# EAGLE board FLR - layout (EAGLE 9.6.2)
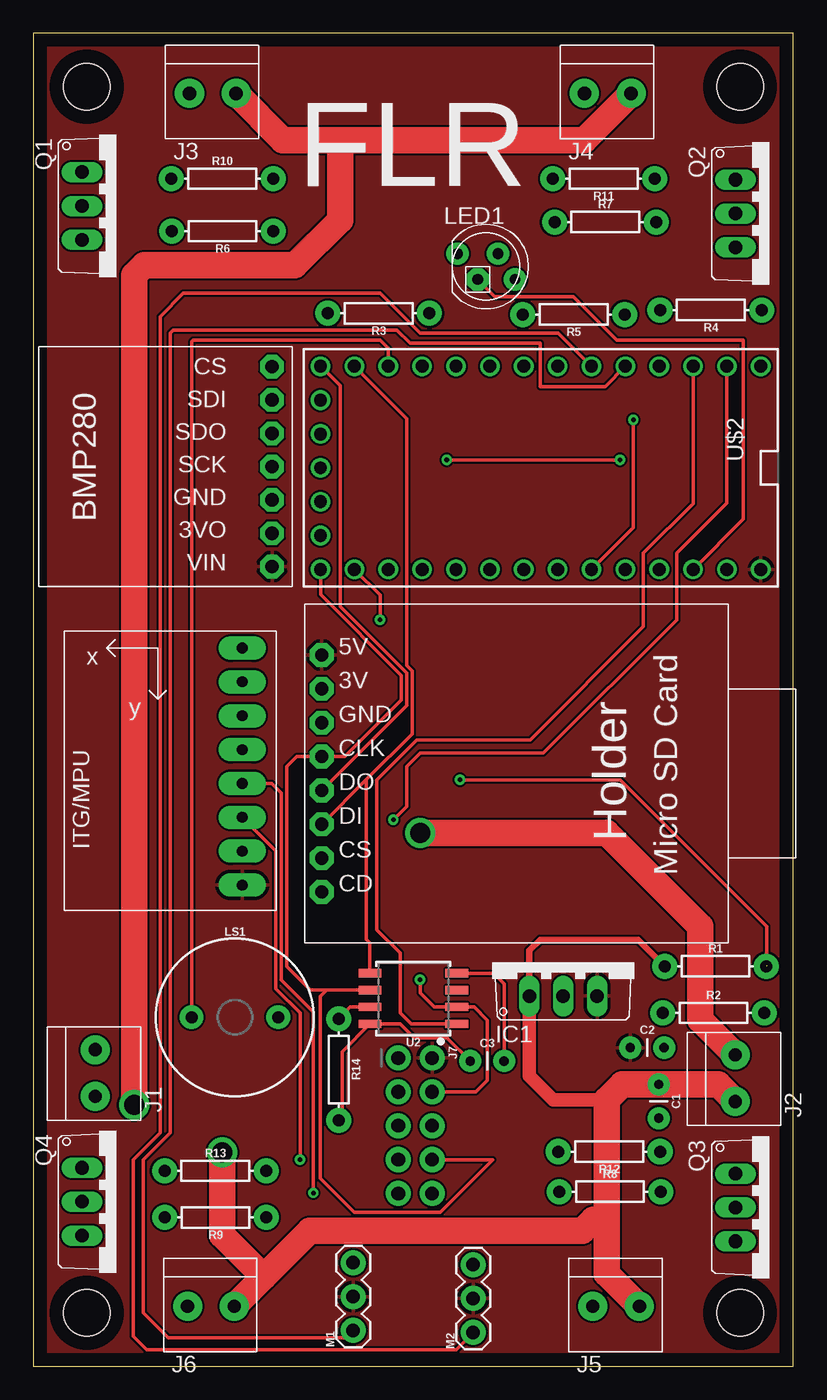
[diagram p0: board, top side]
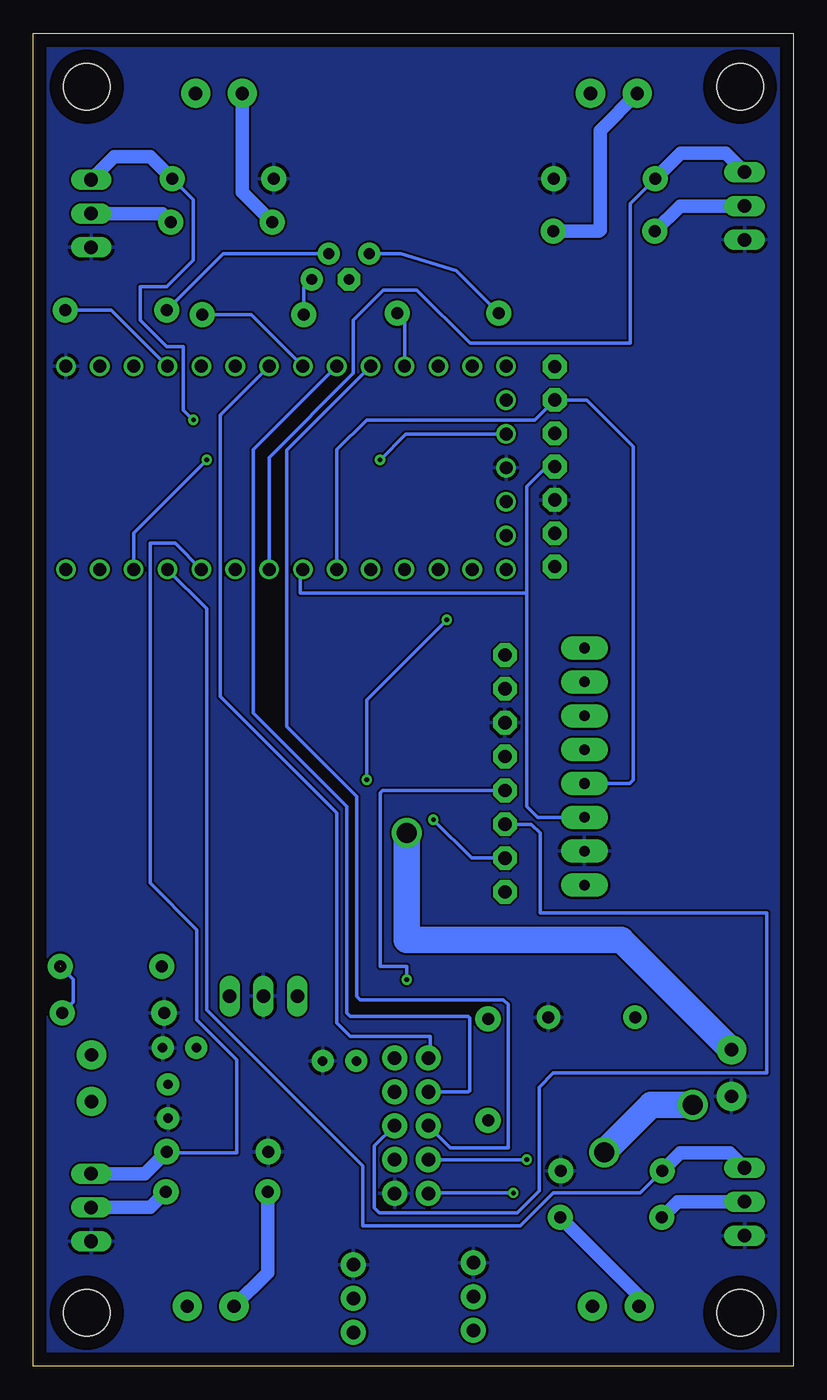
[diagram p1: board, bottom side, seen from below]

Size 57 x 100 mm. Coordinates in mm from the lower left corner, seen from the top.
Outline: 0,0 57,0 57,100 0,100 0,0
Copper layers (1*16): Top 0.035mm / dielectric 1.5mm / Bottom 0.035mm
Design rules "default": minimum track width 6mil, minimum drill 0.35mm, track to track 6mil, track to pad 6mil, pad to pad 6mil, via to via 6mil, smd to smd 6mil, copper to edge 40mil, drill to drill 6mil, minimum pad ring 10mil, minimum via ring 8mil, stop-mask expansion 4mil, vias tented up to drill 0mil, thermal gap 10mil
Holes 3.5 mm at 4,4 53,4 53,96 4,96

## Footprints (pad centres in the part's own frame; a part is rotated, then mirrored left to right if it is on the bottom)
CAP-PTH-2.54 = drill 0.7 pad 1.651: 1 -1.27,0; 2 1.27,0
TO220V = drill 1.016 long: 1 -2.54,-2.54; 2 0,-2.54; 3 2.54,-2.54
1X2-3.5MM = drill 1 pad 2.184: 1 1.8,0; 2 -1.7,0
2X5_NOSILK = drill 1.016 pad 1.88: 1 0,0; 2 0,2.54; 3 2.54,0; 4 2.54,2.54; 5 5.08,0; 6 5.08,2.54; 7 7.62,0; 8 7.62,2.54; 9 10.16,0; 10 10.16,2.54
LED5MMRGB = drill 0.8 pad 1.676: 1 -2.159,0.968; 3 0.889,0.968; 4 2.159,-0.968 | drill 0.8 pad 1.676 octagon: 2 -0.635,-0.968
BUZZER-12MM = drill 0.9 pad 1.778: + 3.25,0; - -3.25,0
1X03 = drill 1.016 pad 1.88: 1 0,0; 2 2.54,0; 3 5.08,0
AXIAL-0.3 = drill 0.9 pad 1.88: P$1 -3.81,0; P$2 3.81,0
GY-521 = drill 0.8 pad 1.778 long: ADO -8.89,-6.35; GND -8.89,6.35; INT -8.89,-8.89; SCL -8.89,3.81; SDA -8.89,1.27; VCC -8.89,8.89; XCL -8.89,-3.81; XDA -8.89,-1.27
SOIC-8 = smd 0.61 x 1.702: 1 -1.905,-3.251; 2 -0.635,-3.251; 3 0.635,-3.251; 4 1.905,-3.251; 5 1.905,3.251; 6 0.635,3.251; 7 -0.635,3.251; 8 -1.905,3.251
MICROSDCARD = drill 1 pad 1.778 octagon: 3V 1.27,19.05; 5V 1.27,21.59; CD 1.27,3.81; CLK 1.27,13.97; CS 1.27,6.35; DI 1.27,8.89; DO 1.27,11.43; GND 1.27,16.51
TEENSY_3.1_BASIC = drill 0.965: 0 -7.62,13.97; 1 -7.62,11.43; 2 -7.62,8.89; 3 -7.62,6.35; 3.3V 7.62,11.43; 3.3V1 -2.54,-16.51; 4 -7.62,3.81; 5 -7.62,1.27; 6 -7.62,-1.27; 7 -7.62,-3.81; 8 -7.62,-6.35; 9 -7.62,-8.89; 10 -7.62,-11.43; 11 -7.62,-13.97; 12 -7.62,-16.51; 13 7.62,-16.51; 14/A0 7.62,-13.97; 15/A1 7.62,-11.43; 16/A2 7.62,-8.89; 17/A3 7.62,-6.35; 18/A4 7.62,-3.81; 19/A5 7.62,-1.27; 20/A6 7.62,1.27; 21/A7 7.62,3.81; 22/A8 7.62,6.35; 23/A9 7.62,8.89; A14 5.08,-16.51; AGND 7.62,13.97; GND -7.62,16.51; GND1 0,-16.51; PGM 2.54,-16.51; VBAT -5.08,-16.51; VIN 7.62,16.51
BMP280 = drill 1 pad 1.778 octagon: 3VO 4,1.5; CS 16.5,1.5; GND 6.5,1.5; SCK 9,1.5; SDI 14,1.5; SDO 11.5,1.5; VIN 1.5,1.5

## Placement (x,y rotation side)
C1  10uf  [CAP-PTH-2.54]  46.9,19.88 270 top
C2  1uf  [CAP-PTH-2.54]  46.04,23.9 0 top
C3  10uf  [CAP-PTH-2.54]  34.03,22.9 0 top
IC1  788TV  [TO220V]  39.74,30.31 0 top
J1  1X2-3.5MM  [1X2-3.5MM]  4.64,22.04 270 top
J2  1X2-3.5MM  [1X2-3.5MM]  52.64,21.66 270 top
J3  1X2-3.5MM  [1X2-3.5MM]  13.51,95.5 180 top
J4  1X2-3.5MM  [1X2-3.5MM]  43.13,95.5 180 top
J5  1X2-3.5MM  [1X2-3.5MM]  43.75,4.5 180 top
J6  1X2-3.5MM  [1X2-3.5MM]  13.37,4.5 180 top
J7  [2X5_NOSILK]  27.37,23.12 270 top
LED1  RGBLED_CA-5MM  [LED5MMRGB]  33.96,82.5 0 top
LS1  BUZZER-PTH  [BUZZER-12MM]  15.12,26.18 0 top
M1  SERVO  [1X03]  23.99,2.68 90 top
M2  SERVO  [1X03]  32.99,2.54 90 top
Q1  [TO220V]  6.2,87.05 270 top
Q2  [TO220V]  55.2,86.48 270 top
Q3  [TO220V]  55.2,11.91 270 top
Q4  [TO220V]  6.2,12.34 270 top
R1  1M  [AXIAL-0.3]  51.17,30.01 0 top
R2  100k  [AXIAL-0.3]  51.01,26.51 0 top
R3  40ohm  [AXIAL-0.3]  25.9,78.99 180 top
R4  1ohm  [AXIAL-0.3]  50.81,79.24 180 top
R5  1ohm  [AXIAL-0.3]  40.53,78.91 180 top
R6  1ohm  [AXIAL-0.3]  14.19,85.16 180 top
R7  1ohm  [AXIAL-0.3]  42.9,85.84 0 top
R8  1ohm  [AXIAL-0.3]  43.24,13.09 0 top
R9  1ohm  [AXIAL-0.3]  13.67,11.16 180 top
R10  470ohm  [AXIAL-0.3]  14.17,89.09 0 top
R11  470ohm  [AXIAL-0.3]  42.78,89.1 180 top
R12  470ohm  [AXIAL-0.3]  43.19,16.1 180 top
R13  470ohm  [AXIAL-0.3]  13.65,14.65 0 top
R14  10M  [AXIAL-0.3]  22.9,22.26 270 top
U1  GY-521MPU6050  [GY-521]  6.78,44.99 180 top
U2  W25Q32FV  [SOIC-8]  28.5,27.58 90 top
U$1  MICROSDCARD  [MICROSDCARD]  20.36,31.77 0 top
U$2  TEENSY_3.1_BASIC  [TEENSY_3.1_BASIC]  38.05,67.4 270 top
U$3  BMP280  [BMP280]  19.4,58.49 90 top

## Library data of the parts
C1-C3 = SparkFun-Capacitors; PROD_ID: CAP-09128
IC1 = linear
J1-J6 LED1 Q1-Q4 = adafruit
J7 = SparkFun-Connectors
LS1 = SparkFun-Electromechanical; PROD_ID: COMP-08253; SF_SKU: COM-07950
M1 M2 = SparkFun-Electromechanical
R1-R14 = SparkFun-Resistors; PROD_ID: RES-09327
U1 = gy-521
U2 = SparkFun-IC-Memory; PROD_ID: IC-13229
U$1 = MicroSD Card Holder
U$2 = Teensy_3_Series_Board_v1.0
U$3 = BMP280

## Nets
3.3V: LED1.2 U$2.3.3V U$2.3.3V1
5V: C2.1 IC1.3 J7.2 M1.2 M2.2 U1.VCC U$1.5V U$2.VIN U$3.VIN
12V: C1.1 IC1.1 J2.1 J3.2 J4.2 J5.2 J6.2 R1.P$1
AGND: U$2.AGND
BATT+: J1.2 J2.2
BUZZER: LS1.- U$2.10
FLASH-CS: U2.1 U$2.1
GND: C1.2 C2.2 C3.2 IC1.2 J1.1 J7.10 LS1.+ M1.3 M2.3 Q1.3 Q2.3 Q3.3 Q4.3 R2.P$1 R10.P$2 R11.P$2 R12.P$2 R13.P$2 U1.GND U2.4 U$1.GND U$2.GND U$2.GND1 U$3.GND
HEADER1: J7.1 U$2.5
HEADER2: J7.3 U$2.7
HEADER3: J7.5 U$2.8
LEDBLU: R5.P$1 U$2.6
LEDGRN: R4.P$1 U$2.2
LEDRED: R3.P$1 U$2.9
MISO: J7.4 U2.2 U$1.DO U$2.12
MOSI: J7.6 U2.5 U$1.DI U$2.11
N$1: Q1.2 R6.P$2
N$2: LED1.1 R3.P$2
N$3: LED1.3 R4.P$2
N$4: LED1.4 R5.P$2
N$5: J3.1 R6.P$1
N$6: Q2.2 R7.P$2
N$7: J4.1 R7.P$1
N$8: Q3.2 R8.P$2
N$9: J5.1 R8.P$1
N$10: Q4.2 R9.P$2
N$11: J6.1 R9.P$1
N$12: C3.1 R14.P$2 U2.8
N$13: R14.P$1 U2.7
PY1: Q1.1 R10.P$1 U$2.20/A6
PY2: Q2.1 R11.P$1 U$2.21/A7
PY3: Q3.1 R12.P$1 U$2.22/A8
PY4: Q4.1 R13.P$1 U$2.23/A9
SCK: J7.8 U2.6 U$1.CLK U$2.13
SCL: J7.7 U1.SCL U$2.19/A5 U$3.SCK
SD-CS: U$1.CS U$2.0
SDA: J7.9 U1.SDA U$2.18/A4 U$3.SDI
TVCX: M1.1 U$2.3
TVCY: M2.1 U$2.4
VBAT: U$2.VBAT
VOLTAGE: R1.P$2 R2.P$2 U$2.14/A0

## Tracks (layer width: path | path; a pad name or v marks a point on that pad's centre or on a via)
3.3V  (via drill 0.35)
  Top 0.25: LED1.2 34.61,80.25 40.5,80.25 43.75,77 53.25,77 53.25,63.55 U$2.3.3V | v31,68 v44,68
  Bottom 0.25: U$2.3.3V1 29.06,69.94 v31,68 | v44,68 49.48,62.52 U$2.3.3V
5V
  pour Top: -3,103 60,103 60,-3 -3,-3
12V  (via drill 1.5)
  Top 0.5: IC1.1 37.2,31.2 38,32 45.37,32 R1.P$1
  Top 1: 37,27.57 IC1.1 37.2,21.8 39,20 43,20
  Top 2: J2.1 51.35,21.15 C1.1 44.15,21.15 43,20 43,11 | 43,11 43,6.95 J5.2 | 43,11 42,11 41.15,10.15 20.72,10.15 17.29,6.71 | 17.29,6.71 J6.2 | J4.2 41.33,92 23,92 | J3.2 18.71,92 23,92 | 23,92 23,86 19.6,82.6 8.32,82.6 7.58,81.85 7.58,19.62 v7.55,19.6 | v14.18,16.05 14.18,9.82 17.29,6.71
  Bottom 2: v7.55,19.6 10.65,19.6 14.18,16.07 v14.18,16.05
BATT+  (via drill 1.5)
  Top 2: v29,40 43,40 50,33 50,26 J2.2
  Bottom 2: J1.2 12.9,32 19,32 | v29,40 29,32 19,32 | 19,32
BUZZER
  Top 0.25: U$2.10 26.62,76.38 26,77 12,77 11.87,76.87 LS1.-
FLASH-CS
  Top 0.25: U2.1 28.32,25.68 27.5,26.5 27.5,31 25.75,32.75 25.75,44 28.75,47 37.25,47 45.75,55.5 45.75,56.25 45.75,57 45.75,61 49.48,64.73 U$2.1
GND
  Top 0.25: U2.4 34.52,29.48 35.3,28.7 C3.2
  pour Bottom: -6,106 63,106 63,-6 -6,-6
HEADER1
  Bottom 0.25: U$2.5 43,71.34 43,50.25 34.25,41.5 34.25,25.75 33.25,24.75 27.25,24.75 27.25,23.24 J7.1
HEADER2
  Bottom 0.25: U$2.7 40.5,68.76 40.5,49 33.5,42 33.5,26.5 33.25,26.25 24.38,26.25 24.27,26.15 24.27,20.68 24.37,20.58 J7.3
HEADER3
  Bottom 0.25: U$2.8 38,68.72 38,48 32.75,42.75 32.75,27.75 32.5,27.5 21.75,27.5 21.4,27.15 21.4,16.4 25.73,16.4 J7.5
LEDBLU
  Bottom 0.25: R5.P$1 40.67,78.91 U$2.6
LEDGRN
  Bottom 0.25: R4.P$1 51.16,79.24 U$2.2
LEDRED
  Bottom 0.25: R3.P$1 29.16,78.44 U$2.9
MISO  (via drill 0.35)
  Top 0.25: U$2.12 23,73.56 23,57 28,52 28,49.57 U$1.DO | v29,29 29,28 30.05,26.95 U2.2 33.05,26.95 34.05,25.95 34.05,21.45 33.18,20.58 J7.4
  Bottom 0.25: U$1.DO 30.8,43.2 31,43 31,30 29,30 v29,29
MOSI
  Top 0.25: U$2.11 28,71.1 28,52.57 28.4,52.17 28.4,47.43 24.98,44.02 | 24.98,44.02 U$1.DI | 24.98,44.02 24.98,32.02 25.25,31.75 U2.5
  Bottom 0.25: U$1.DI 19.66,40.66 19,40 19,34 2,34 2,22 18,22 19.07,20.93 19.07,13.15 20.7,11.53 31.05,11.53 31.43,11.9 31.43,16.52 J7.6
N$1
  Bottom 1: Q1.2 8.49,87.05 R6.P$2
N$2
  Bottom 0.25: LED1.1 29.43,83.47 25.29,82.19 R3.P$2
N$3
  Bottom 0.25: LED1.3 42.77,83.47 R4.P$2
N$4
  Bottom 0.25: LED1.4 36.72,80.93 R5.P$2
N$5
  Bottom 1: J3.1 14.5,92.71 14.5,85.25 14.59,85.16 R6.P$1
N$6
  Bottom 1: Q2.2 47.35,86.48 R7.P$2
N$7
  Bottom 1: J4.1 41.33,88.08 R7.P$1
N$8
  Bottom 1: R8.P$2 48.23,11.91 Q3.2
N$9
  Bottom 1: J5.1 39.43,7.02 R8.P$1
N$10
  Bottom 1: Q4.2 8.68,12.34 R9.P$2
N$11
  Bottom 1: J6.1 11.57,5.25 R9.P$1
N$12
  Top 0.25: R14.P$2 23.15,18.7 23.15,23.58 U2.8 27.52,25.68 28.55,24.65 31,24.65 31.02,24.65 | 31.02,24.65 31.05,24.65 | 31.02,24.65 C3.1
N$13
  Top 0.25: U2.7 23.77,26.95 R14.P$1
PY1
  Bottom 0.25: R10.P$1 12.25,87.2 12.25,76.75 24.25,76.75 28.25,80.75 30.75,80.75 33,78.5 33,74.5 39.32,68.18 U$2.20/A6
  Bottom 1: Q1.1 5.07,91 8.45,91 R10.P$1
PY2  (via drill 0.35)
  Top 0.25: v45,71 45,62.92 U$2.21/A7
  Bottom 0.25: R11.P$1 45,87.51 45,83 47,81 49,81 49,78.5 47,76.5 45.75,76.5 45.75,71.75 v45,71
  Bottom 1: Q2.1 50.93,90.75 48.24,90.75 R11.P$1
PY3
  Bottom 0.25: U$2.22/A8 46.37,61.75 48.25,61.75 48.25,36.25 44.75,32.75 44.75,26 41.75,23 41.75,16 46.9,16 R12.P$1
  Bottom 1: R12.P$1 48.65,14.45 Q3.1
PY4
  Bottom 0.25: U$2.23/A9 44,56.84 44,26.75 32.3,15.05 32.3,10.53 20.48,10.53 18,13 11.49,13 R13.P$1
  Bottom 1: Q4.1 4.78,16 8.49,16 R13.P$1
SCK
  Top 0.25: U$2.13 21.54,57.89 27.6,51.83 27.6,50 23.34,45.74 U$1.CLK 19.74,45.74 19,45 19,30 20.79,28.21 22,28.21 | 22,28.21 U2.6 | 22,28.21 21.52,27.74 21.52,15 21.52,14.4 21.52,14.1 24.07,11.55 30.52,11.55 34.45,15.47 34.42,15.5 J7.8
SCL  (via drill 0.35)
  Top 0.25: U1.SCL 18.2,38.66 18.2,28.3 20,26.5 v20,15.5
  Bottom 0.25: U$2.19/A5 37,59.56 37,58 20,58 | 20,58 20,66 18.51,67.49 U$3.SCK | 20,58 20,42 19.18,41.18 U1.SCL | v20,15.5 J7.7
SD-CS  (via drill 0.35)
  Top 0.25: U$2.0 52.02,64.77 48.25,61 48.25,56 38.25,46 29,46 28,45 28,42 v27,41
  Bottom 0.25: v27,41 24.12,38.12 U$1.CS
SDA  (via drill 0.35)
  Top 0.25: U1.SDA 17.88,43.72 18.6,43 18.6,29 21,26.6 v21,13
  Bottom 0.25: U$2.18/A4 34.24,68.76 32,71 19.39,71 U$3.SDI 15.49,72.49 12,69 12,44 12.28,43.72 U1.SDA | v21,13 27.33,13 J7.9
TVCX
  Top 0.25: U$2.3 42.88,73.5 38,73.5 38,76.75 28.25,76.75 27.25,77.75 10.5,77.75 10.25,77.5 10.25,17.5 8.25,15.5 8.25,4 10.12,2.12 23.43,2.12 M1.1
TVCY
  Top 0.25: U$2.4 39.38,77.5 29,77.5 26,80.5 11.25,80.5 9.5,78.75 9.5,17.5 7.5,15.5 7.5,4 7.5,3.64 7.5,2.25 8.5,1.25 31.7,1.25 M2.1
VOLTAGE  (via drill 0.35)  (1 unrouted)
  Top 0.25: U$2.14/A0 26,57.86 v26,56 | v32,44 44,44 55,33 55,30.03
  Bottom 0.25: v26,56 32,50 v32,44 | R1.P$2 54,29.03 54,27.33 R2.P$2

## Text on the board
tNames: FLR